# EAGLE board display_breakout (EAGLE 8.1.1)
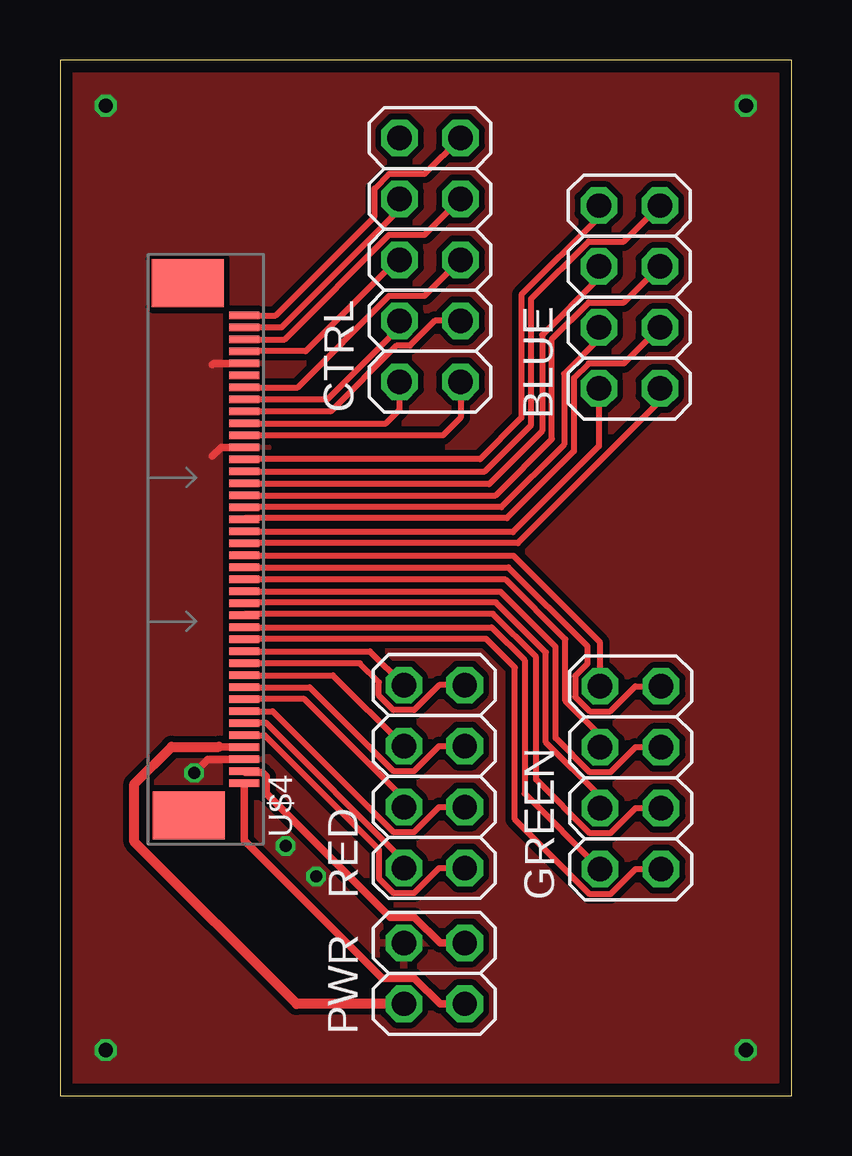
[diagram p0: board, top side]
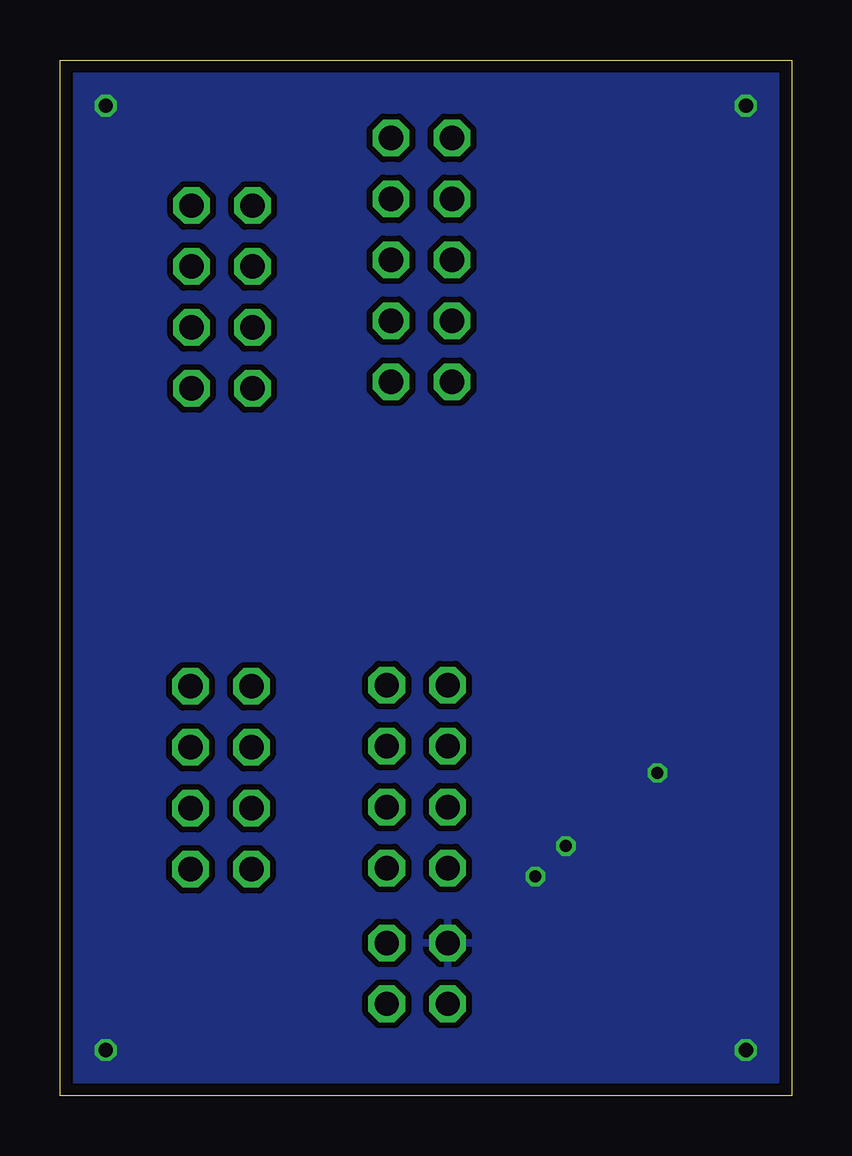
[diagram p1: board, bottom side, seen from below]

Size 30.48 x 43.18 mm. Coordinates in mm from the lower left corner, seen from the top.
Outline: 0,0 30.48,0 30.48,43.18 0,43.18 0,0
Copper layers (1*16): Top 0.035mm / dielectric 1.6mm / Bottom 0.035mm
Design rules "Elecrow_2-layer_PCB_eagle_rule": minimum track width 6mil, minimum drill 12mil, track to track 6mil, track to pad 6mil, pad to pad 6mil, via to via 8mil, smd to smd 0mil, copper to edge 20mil, drill to drill 10mil, minimum pad ring 6mil, minimum via ring 6mil, stop-mask expansion 0mil, vias tented up to drill 100mil, thermal gap 10mil

## Footprints (pad centres in the part's own frame; a part is rotated, then mirrored left to right if it is on the bottom)
2X04 = drill 1.016 octagon: 1 -3.81,-1.27; 2 -3.81,1.27; 3 -1.27,-1.27; 4 -1.27,1.27; 5 1.27,-1.27; 6 1.27,1.27; 7 3.81,-1.27; 8 3.81,1.27
2X05 = drill 1.016 octagon: 1 -5.08,-1.27; 2 -5.08,1.27; 3 -2.54,-1.27; 4 -2.54,1.27; 5 0,-1.27; 6 0,1.27; 7 2.54,-1.27; 8 2.54,1.27; 9 5.08,-1.27; 10 5.08,1.27
2X02 = drill 1.016 octagon: 1 -1.27,-1.27; 2 -1.27,1.27; 3 1.27,-1.27; 4 1.27,1.27
ZIF40 = smd 0.3 x 1.25: P$1 -9.75,0; P$2 -9.25,0; P$3 -8.75,0; P$4 -8.25,0; P$5 -7.75,0; P$6 -7.25,0; P$7 -6.75,0; P$8 -6.25,0; P$9 -5.75,0; P$10 -5.25,0; P$11 -4.75,0; P$12 -4.25,0; P$13 -3.75,0; P$14 -3.25,0; P$15 -2.75,0; P$16 -2.25,0; P$17 -1.75,0; P$18 -1.25,0; P$19 -0.75,0; P$20 -0.25,0; P$21 0.25,0; P$22 0.75,0; P$23 1.25,0; P$24 1.75,0; P$25 2.25,0; P$26 2.75,0; P$27 3.25,0; P$28 3.75,0; P$29 4.25,0; P$30 4.75,0; P$31 5.25,0; P$32 5.75,0; P$33 6.25,0; P$34 6.75,0; P$35 7.25,0; P$36 7.75,0; P$37 8.25,0; P$38 8.75,0; P$39 9.25,0; P$40 9.75,0 | smd 2 x 3: P$41 -11.1,2.3; P$42 11.1,2.35

## Placement (x,y rotation side)
BLUE  [2X04]  23.72,33.3 90 top
CTRL  [2X05]  15.42,34.85 90 top
GREEN  [2X04]  23.77,13.26 90 top
PWR  [2X02]  15.6,5.11 90 top
RED  [2X04]  15.6,13.31 90 top
U$4  ZIF40_0.5MM_PITCH  [ZIF40]  7.67,22.78 90 top

## Library data of the parts
BLUE CTRL GREEN PWR RED = Headers_IFE
U$4 = Connectors

## Nets
+3V3: PWR.2 U$4.P$4
BLUE_0: BLUE.1 U$4.P$21
BLUE_1: BLUE.2 U$4.P$22
BLUE_2: BLUE.3 U$4.P$23
BLUE_3: BLUE.4 U$4.P$24
BLUE_4: BLUE.5 U$4.P$25
BLUE_5: BLUE.6 U$4.P$26
BLUE_6: BLUE.7 U$4.P$27
BLUE_7: BLUE.8 U$4.P$28
DISP_CLK: CTRL.1 U$4.P$30
DISP_DEN: CTRL.5 U$4.P$34
DISP_EN: CTRL.2 U$4.P$31
DISP_HSYNC: CTRL.3 U$4.P$32
DISP_LEDA: PWR.3 U$4.P$2
DISP_LEDK: PWR.1 U$4.P$1
DISP_VSYNC: CTRL.4 U$4.P$33
DISP_XL: CTRL.8 U$4.P$39
DISP_XR: CTRL.6 U$4.P$37
DISP_YD: CTRL.7 U$4.P$38
DISP_YU: CTRL.9 U$4.P$40
GND: PWR.4 U$4.P$3 U$4.P$29 U$4.P$36
GREEN_0: GREEN.1 U$4.P$13
GREEN_1: GREEN.2 U$4.P$14
GREEN_2: GREEN.3 U$4.P$15
GREEN_3: GREEN.4 U$4.P$16
GREEN_4: GREEN.5 U$4.P$17
GREEN_5: GREEN.6 U$4.P$18
GREEN_6: GREEN.7 U$4.P$19
GREEN_7: GREEN.8 U$4.P$20
NOT_CONNECTED: U$4.P$35
RED_0: RED.1 U$4.P$5
RED_1: RED.2 U$4.P$6
RED_2: RED.3 U$4.P$7
RED_3: RED.4 U$4.P$8
RED_4: RED.5 U$4.P$9
RED_5: RED.6 U$4.P$10
RED_6: RED.7 U$4.P$11
RED_7: RED.8 U$4.P$12

## Tracks (layer width: path | path; a pad name or v marks a point on that pad's centre or on a via)
+3V3
  Top 0.305: 6.62,14.55 7.65,14.55 U$4.P$4
  Top 0.406: PWR.2 9.86,3.83 3.1,10.59 3.1,13.01 4.65,14.55 6.62,14.55
BLUE_0
  Top 0.254: BLUE.1 24.99,28.96 19.07,23.04 U$4.P$21
BLUE_1
  Top 0.254: BLUE.2 22.45,27.08 18.87,23.5 7.71,23.5 U$4.P$22
BLUE_2
  Top 0.254: BLUE.3 23.5,30.53 22.02,30.53 21.41,29.92 21.41,26.87 18.62,24.08 7.72,24.08 U$4.P$23
BLUE_3
  Top 0.254: BLUE.4 22.45,31.54 21.01,30.09 21.01,27.15 18.39,24.54 U$4.P$24
BLUE_4
  Top 0.254: U$4.P$25 18.15,25.03 20.5,27.38 20.5,31.55 22.02,33.07 23.5,33.07 BLUE.5
BLUE_5
  Top 0.254: BLUE.6 22.45,34.08 20.09,31.71 20.09,27.71 17.88,25.5 7.7,25.5 U$4.P$26
BLUE_6
  Top 0.254: U$4.P$27 17.7,26.03 19.63,27.96 19.63,33.22 22.02,35.61 23.5,35.61 BLUE.7
BLUE_7
  Top 0.254: BLUE.8 22.45,36.62 19.23,33.39 19.23,28.27 17.5,26.54 7.68,26.54 U$4.P$28
DISP_CLK
  Top 0.254: CTRL.1 16.69,28.27 15.95,27.53 U$4.P$30 | U$4.P$30
DISP_DEN
  Top 0.254: CTRL.5 15.19,33.35 13.72,33.35 9.9,29.53 U$4.P$34
DISP_EN
  Top 0.254: U$4.P$31 13.58,28.03 14.15,28.6 CTRL.2
DISP_HSYNC
  Top 0.254: CTRL.3 15.62,32.31 14.58,31.27 14.02,31.27 11.28,28.52 U$4.P$32
DISP_LEDA
  Top 0.305: U$4.P$2 7.71,13.49 8.42,13.49 8.6,13.31 8.6,12.6 13.76,7.44 14.77,7.44 15.83,6.38 PWR.3
DISP_LEDK
  Top 0.305: PWR.1 15.83,3.83 14.77,4.9 13.44,4.9 7.69,10.65 7.69,13.02 U$4.P$1
DISP_VSYNC
  Top 0.254: CTRL.4 14.15,32.05 11.12,29.03 U$4.P$33
DISP_XL
  Top 0.254: CTRL.8 14.15,36.96 9.22,32.03 U$4.P$39
DISP_XR
  Top 0.254: CTRL.6 14.05,34.85 10.24,31.04 U$4.P$37
DISP_YD
  Top 0.254: CTRL.7 15.19,35.89 13.72,35.89 9.36,31.53 U$4.P$38
DISP_YU
  Top 0.254: U$4.P$40 8.99,32.53 13.11,36.65 13.11,37.82 13.72,38.43 15.19,38.43 CTRL.9
GND  (via drill 0.5, 0.6)
  Top 0.305: U$4.P$36 6.4,30.53 6.35,30.48 | U$4.P$29 6.71,27.03 6.35,26.67 | U$4.P$3 6.16,14.03 v5.59,13.46
  other vias: 10.67,9.14 9.4,10.41 28.57,41.27 1.91,41.27 1.91,1.91 28.57,1.91
  pour Bottom (isolate 0.254): 0.64,42.55 0.64,0.64 29.84,0.64 29.84,42.55
  pour Top (isolate 0.254): 0.64,42.55 29.84,42.55 29.84,0.64 0.64,0.64
GREEN_0
  Top 0.254: GREEN.1 23.98,9.45 22.94,8.41 22.07,8.41 18.95,11.53 18.95,17.86 17.75,19.05 7.69,19.05 U$4.P$13
GREEN_1
  Top 0.254: U$4.P$14 17.98,19.53 19.36,18.16 19.36,12.6 GREEN.2
GREEN_2
  Top 0.254: GREEN.3 23.98,11.99 22.94,10.95 22.07,10.95 19.84,13.18 19.84,18.29 18.03,20.09 7.73,20.09 U$4.P$15
GREEN_3
  Top 0.254: GREEN.4 22.5,12.48 20.24,14.74 20.24,18.49 18.16,20.57 7.71,20.57 U$4.P$16
GREEN_4
  Top 0.254: GREEN.5 23.98,14.53 22.94,13.49 22.07,13.49 20.65,14.91 20.65,18.72 18.36,21.01 7.7,21.01 U$4.P$17
GREEN_5
  Top 0.254: GREEN.6 22.5,15.02 21.06,16.47 21.06,19.02 18.57,21.51 7.69,21.51 U$4.P$18
GREEN_6
  Top 0.254: U$4.P$19 18.68,22.03 21.97,18.75 21.97,18.01 21.46,17.5 21.46,16.64 22.07,16.03 22.94,16.03 23.98,17.07 GREEN.7
GREEN_7
  Top 0.254: GREEN.8 22.5,18.9 18.9,22.5 7.7,22.5 U$4.P$20
RED_0
  Top 0.254: U$4.P$5 8.52,15.03 13.28,10.27 13.28,9.07 13.89,8.46 14.76,8.46 15.8,9.5 RED.1
RED_1
  Top 0.254: RED.2 14.33,9.8 8.59,15.54 7.68,15.54 U$4.P$6
RED_2
  Top 0.254: U$4.P$7 8.86,16.03 13.89,11 14.76,11 15.8,12.04 RED.3
RED_3
  Top 0.254: RED.4 14.33,12.39 10.19,16.54 U$4.P$8
RED_4
  Top 0.254: U$4.P$9 10.4,17.03 13.89,13.54 14.76,13.54 15.8,14.58 RED.5
RED_5
  Top 0.254: U$4.P$10 11.37,17.53 RED.6
RED_6
  Top 0.254: RED.7 15.8,17.12 14.76,16.08 13.89,16.08 13.28,16.69 13.28,17.25 12.5,18.03 U$4.P$11 | U$4.P$11
RED_7
  Top 0.254: U$4.P$12 12.91,18.53 RED.8

## Text on the board
112bmp: Display / Breakout | Andrew / Smith | 2018